# Altium PCB TCRT 16 (PCB1).PcbDoc
Units mm, origin at the board's own origin, x right, y up, seen from the top; angles counter-clockwise.
Board outline 110 x 85.31 mm, 2 copper layers (Top Layer, Bottom Layer); 56 components, 44 nets, 238 pads, 0 vias.
Unrouted connection lines stored in the file: 135.
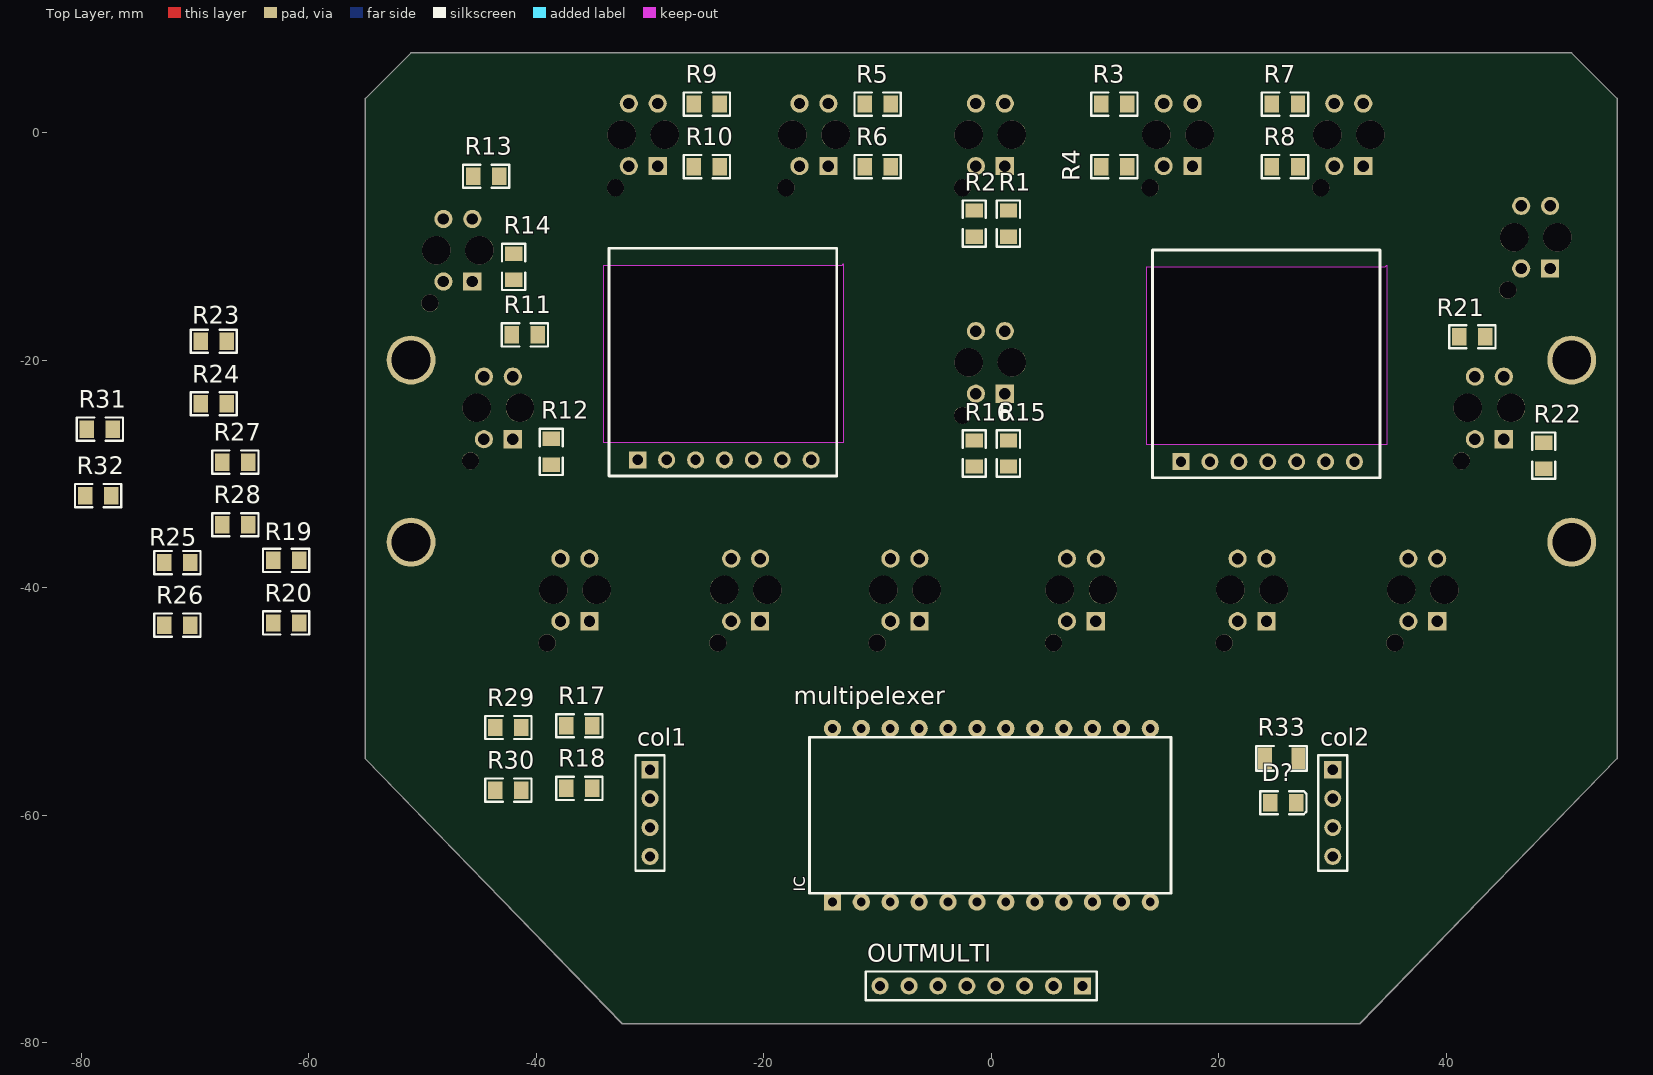
[diagram p0: Top Layer view]
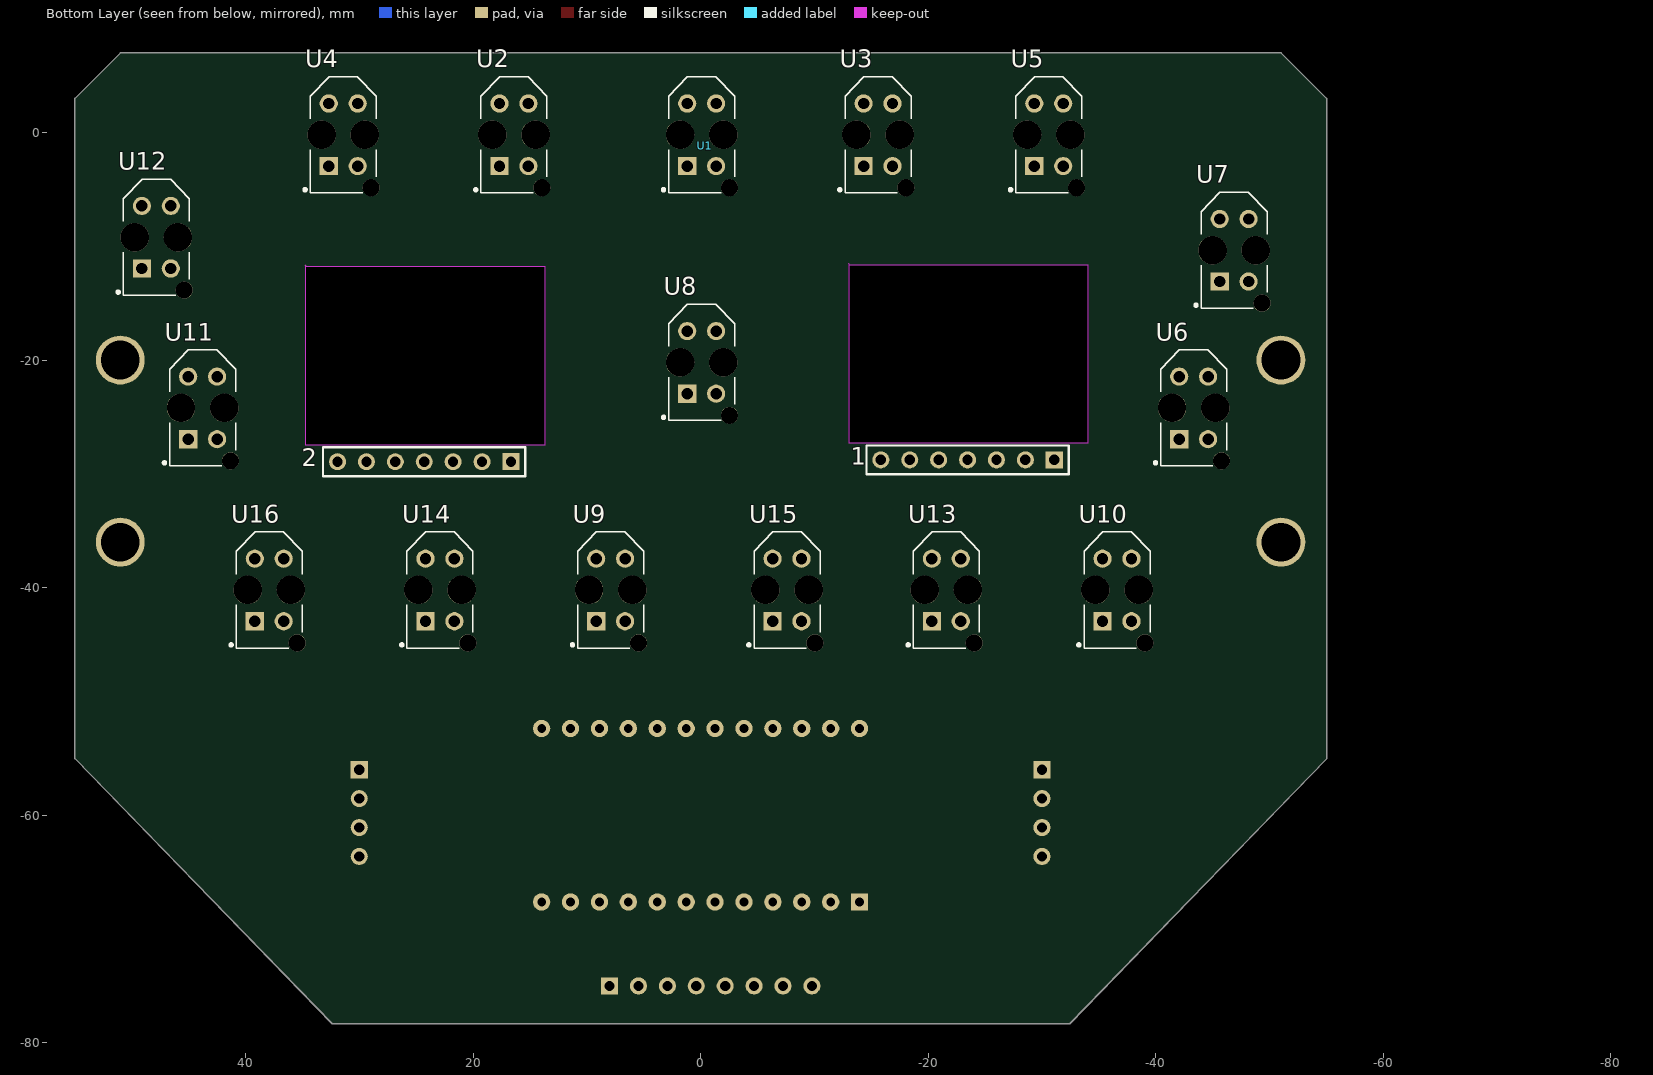
[diagram p1: Bottom Layer view, seen from below]

## Layer stack, top to bottom
Top Solder: solder mask 0.0102, Solder Resist, Dk 3.5
Top Layer: signal copper 0.0356
Dielectric 1: dielectric 0.32, FR-4, Dk 4.8
Bottom Layer: signal copper 0.0356
Bottom Solder: solder mask 0.0102, Solder Resist, Dk 3.5

## Board outline
-55.014,-55.056 -55.014,2.994 -51.014,6.994 50.986,6.994 54.986,2.994 54.986,-55.021 32.372,-78.32 -32.434,-78.32
cut-out: -34.08,-27.268 -34.08,-11.647 -13.125,-11.647 -12.998,-11.52 -12.998,-27.268
cut-out: 13.669,-27.432 13.669,-11.811 34.624,-11.811 34.751,-11.684 34.751,-27.432

## Design rules (kind name [scope] priority, off if disabled: settings)
Clearance [All] p1: gap=0.254 ignorepadtopadclearanceinfootprint=FALSE except(0: Arc-Hole Track-Hole SMDPad-Hole THPad-Hole Via-Hole Fill-Hole Poly-Hole Region-Hole Text-Hole)
PolygonConnect [All] p1: connectstyle=Relief reliefconductorwidth=0.254 reliefentries=4 polygonreliefangle="90 Angle" airgapwidth=0.254
RoutingVias [All] p1: holewidth=0.711 width=1.27 viastyle="Through Hole" minholewidth=0.711 minwidth=1.27 maxholewidth=0.711 maxwidth=1.27
SolderMaskExpansion [All] p1: expansion=0.102 istentingtop=FALSE
Width "Schematic Width Constraint_1" [InNet('VCC')] p1: maxlimit=1.5 minlimit=1 preferedwidth=1 minimp=50.000000 maximp=50.000000 favimp=50.000000
Width "Schematic Width Constraint" [InNet('GND')] p2: maxlimit=2 minlimit=1.7 preferedwidth=1.2 minimp=50.000000 maximp=50.000000 favimp=50.000000
Width [All] p3: maxlimit=1 minlimit=0.5 preferedwidth=0.7 minimp=50.000000 maximp=50.000000 favimp=50.000000
30 further rules are at their usual default settings.

## Components (designator, comment, footprint, x,y, rotation, side; value= is the part's Value field where it differs from the comment)
1 "Header 7" HDR1X7 -31.08,-28.768 r0 bottom locked
2 "Header 7" HDR1X7 16.669,-28.932 r0 bottom locked
col1 "Header 4" HDR1X4 -30,-56 r270 top
col2 "Header 4" HDR1X4 30,-56 r270 top
D? "LED-SMD(0805)" "0805 LED" 25.66,-58.894 r0 top
multipelexer "BC4067BE_*" PCBComponent_1 0,-60 r90 top
OUTMULTI "Header 8" HDR1X8 8,-75 r180 top
R1 "150" 0805 1.5,-8 r270 top
R2 "10K" 0805 -1.5,-8 r270 top
R3 "150" 0805 10.8,2.5 r180 top
R4 "10K" 0805 10.8,-3 r180 top
R5 "150" 0805 -10,2.5 r0 top
R6 "10K" 0805 -10,-3 r0 top
R7 "150" 0805 25.8,2.5 r180 top
R8 "10K" 0805 25.8,-3 r180 top
R9 "150" 0805 -25,2.5 r0 top
R10 "10K" 0805 -25,-3 r0 top
R11 "150" 0805 -40.991,-17.784 r0 top
R12 "10K" 0805 -38.688,-28.07 r270 top
R13 "150" 0805 -44.408,-3.84 r0 top
R14 "10K" 0805 -41.99,-11.816 r90 top
R15 "150" 0805 1.5,-28.211 r270 top
R16 "10K" 0805 -1.5,-28.211 r270 top
R17 "150" 0805 -36.203,-52.139 r180 top
R18 "10K" 0805 -36.203,-57.639 r180 top
R19 "150" 0805 -61.985,-37.603 r0 top
R20 "10K" 0805 -61.985,-43.103 r0 top
R21 "150" 0805 42.262,-17.956 r180 top
R22 "10K" 0805 48.548,-28.399 r270 top
R23 "150" 0805 -68.341,-18.341 r0 top
R24 "10K" 0805 -68.341,-23.841 r0 top
R25 "150" 0805 -71.532,-37.793 r0 top
R26 "10K" 0805 -71.532,-43.293 r0 top
R27 "150" 0805 -66.446,-28.964 r180 top
R28 "10K" 0805 -66.446,-34.464 r180 top
R29 "150" 0805 -42.442,-52.29 r0 top
R30 "10K" 0805 -42.442,-57.79 r0 top
R31 "150" 0805 -78.343,-26.066 r180 top
R32 "10K" 0805 -78.509,-31.912 r180 top
R33 "150" 1206 25.5,-55 r180 top
U1 "TCRT500" TCRT5000 -0.5,0 r90 bottom locked
U2 "TCRT500" TCRT5000 16,0 r90 bottom
U3 "TCRT500" TCRT5000 -16,0 r90 bottom
U4 "TCRT500" TCRT5000 31,0 r90 bottom
U5 "TCRT500" TCRT5000 -31,0 r90 bottom
U6 "TCRT500" TCRT5000 -43.734,-24 r90 bottom
U7 "TCRT500" TCRT5000 -47.294,-10.145 r90 bottom
U8 "TCRT500" TCRT5000 -0.5,-20 r90 bottom locked
U9 "TCRT500" TCRT5000 7.5,-40 r90 bottom
U10 "TCRT500" TCRT5000 -37,-40 r90 bottom
U11 "TCRT500" TCRT5000 43.358,-24 r90 bottom
U12 "TCRT500" TCRT5000 47.425,-9 r90 bottom
U13 "TCRT500" TCRT5000 -22,-40 r90 bottom
U14 "TCRT500" TCRT5000 22.5,-40 r90 bottom
U15 "TCRT500" TCRT5000 -8,-40 r90 bottom
U16 "TCRT500" TCRT5000 37.5,-40 r90 bottom

## Footprints (in the part's own frame and the unit in brackets; to place one, negate y for a bottom-side part, rotate by r counter-clockwise, add the part's x,y. Pads: shape width x height; smd on the part's side, far side on the other; paste and mask are expansions set on the pad)
0805 [mil]
  rect 50x60 smd: 1(-45,0) 2(45,0)
  silkscreen extent -80,-40 80,40, body extent -39,-25 39,25, height 31
"0805 LED" [mil]
  rect 50x60 smd: 1(-45,0) 2(45,0)
  silkscreen extent -80,-40 80,40, body extent -39,-25 39,25, height 32
1206 [mm]
  rect 1.2x1.9 smd: 1(-1.46,0) 2(1.46,0)
  silkscreen extent -2.22,-1.09 2.22,1.09, body extent -1.59,-0.8 1.61,0.8, height 1
HDR1X4 [mm] "Connector; Header; 4 Position"
  rect 1.5x1.5 hole 0.9: 1(0,0)
  round 1.5 hole 0.9: 2(2.54,0) 3(5.08,0) 4(7.62,0)
  silkscreen extent -1.27,-1.27 8.89,1.27
HDR1X7 [mm] "Connector; Header; 7 Position"
  rect 1.5x1.5 hole 0.9: 1(0,0)
  round 1.5 hole 0.9: 2(2.54,0) 3(5.08,0) 4(7.62,0) 5(10.16,0) 6(12.7,0) 7(15.24,0)
  silkscreen extent -1.27,-1.27 16.51,1.27
HDR1X8 [mm] "Connector; Header; 8 Position"
  rect 1.5x1.5 hole 0.9: 1(0,0)
  round 1.5 hole 0.9: 2(2.54,0) 3(5.08,0) 4(7.62,0) 5(10.16,0) 6(12.7,0) 7(15.24,0) 8(17.78,0)
  silkscreen extent -1.27,-1.27 19.05,1.27
PCBComponent_1 [mil]
  rect 60x60 hole 30 paste+0: 1(-300,550)
  round 60 hole 30 paste+0: 2(-300,450) 3(-300,350) 4(-300,250) 5(-300,150) 6(-300,50) 7(-300,-50) 8(-300,-150) 9(-300,-250) 10(-300,-350) 11(-300,-450) 12(-300,-550) 13(300,-550) 14(300,-450) 15(300,-350) 16(300,-250) 17(300,-150) 18(300,-50) 19(300,50) 20(300,150) 21(300,250) 22(300,350) 23(300,450) 24(300,550)
  silkscreen extent -270,-621 270,629, body extent -295,-616 296,634, height 36
TCRT5000 [mm]
  round 1.6 hole 1: A(2.547,1.676) E(-2.953,-0.864) K(2.547,-0.864)
  rect 1.6x1.6 hole 1: C(-2.953,1.676)
  round 1.5 hole 1.5 unplated: None(-4.853,-2.044)
  round 2.5 hole 2.5 unplated: None(-0.203,-1.494) None(-0.203,2.306)
  silkscreen extent -5.3,-2.49 4.9,3.88, body extent -5.28,-3 4.92,3.8, height 7.2

## Part data
1 2: "Header, 7-Pin", LatestRevisionDate=17-Jul-2002, LatestRevisionNote="Re-released for DXP Platform.", Publisher="Altium Limited"
col1 col2: "Header, 4-Pin", LatestRevisionDate=17-Jul-2002, LatestRevisionNote="Re-released for DXP Platform.", Publisher="Altium Limited"
OUTMULTI: "Header, 8-Pin", LatestRevisionDate=17-Jul-2002, LatestRevisionNote="Re-released for DXP Platform.", Publisher="Altium Limited"
R1 R2 R3 R4 R5 R6 R7 R8 R9 R10 R11 R12 R13 R14 R15 R16 R17 R18 R19 R20 R21 R22 R23 R24 R25 R26 R27 R28 R29 R30 R31 R32 R33: library part RESISTOR_SMD, "Choose your Favorite size from Footprint Section"
U1 U2 U3 U4 U5 U6 U7 U8 U9 U10 U11 U12 U13 U14 U15 U16: library part TCRT5000

## Free pads (board coordinates)
  round 4.3 hole 3.4: 20(-51,-36) 20(-51,-20) 20(51,-36) 20(51,-20)

## Nets (pads, with @x,y where several pads share a name; then routed paths per layer and width w, separated by ;. In a path a pad name is that pad's centre, name@x,y a point inside that pad or via, vN(x,y) a via of type N, cw(c..) or ccw(c..) an arc to the next point about the centre after c; other vN are vias at no path point)
A: multipelexer.10 OUTMULTI.2
B: multipelexer.11 OUTMULTI.3
C: multipelexer.14 OUTMULTI.4
D: multipelexer.13 OUTMULTI.5
GND: 1.6 2.6 col1.4 col2.4 D?.2 multipelexer.12 multipelexer.15 OUTMULTI.8 U1.E U1.K U2.E U2.K U3.E U3.K U4.E U4.K U5.E U5.K U6.E U6.K U7.E U7.K U8.E U8.K U9.E U9.K U10.E U10.K U11.E U11.K U12.E U12.K U13.E U13.K U14.E U14.K U15.E U15.K U16.E U16.K
NetD?_1: D?.1 R33.2
NetR1_1: R1.1 U1.A
NetR3_1: R3.1 U2.A
NetR5_1: R5.1 U3.A
NetR7_1: R7.1 U4.A
NetR9_1: R9.1 U5.A
NetR11_1: R11.1 U6.A
NetR13_1: R13.1 U7.A
NetR15_1: R15.1 U8.A
NetR17_1: R17.1 U9.A
NetR19_1: R19.1 U10.A
NetR21_1: R21.1 U11.A
NetR23_1: R23.1 U12.A
NetR25_1: R25.1 U13.A
NetR27_1: R27.1 U14.A
NetR29_1: R29.1 U15.A
NetR31_1: R31.1 U16.A
OUT1: multipelexer.6 R2.1 U1.C
OUT2: multipelexer.7 R4.1 U2.C
OUT3: multipelexer.5 R6.1 U3.C
OUT4: multipelexer.8 R8.1 U4.C
OUT5: multipelexer.4 R10.1 U5.C
OUT6: multipelexer.9 R12.1 U6.C
OUT7: multipelexer.3 R14.1 U7.C
OUT8: multipelexer.17 R16.1 U8.C
OUT9: multipelexer.20 R18.1 U9.C
OUT10: multipelexer.23 R20.1 U10.C
OUT11: multipelexer.16 R22.1 U11.C
OUT12: multipelexer.2 R24.1 U12.C
OUT13: multipelexer.22 R26.1 U13.C
OUT14: multipelexer.19 R28.1 U14.C
OUT15: multipelexer.21 R30.1 U15.C
OUT16: multipelexer.18 R32.1 U16.C
OUTPUT: multipelexer.1 OUTMULTI.6
SCL0: 1.4 col1.2
SCL1: 2.4 col2.2
SDA0: 1.3 col1.1
SDA1: 2.3 col2.1
VCC: 1.7 2.7 col1.3 col2.3 multipelexer.24 OUTMULTI.1 R1.2 R2.2 R3.2 R4.2 R5.2 R6.2 R7.2 R8.2 R9.2 R10.2 R11.2 R12.2 R13.2 R14.2 R15.2 R16.2 R17.2 R18.2 R19.2 R20.2 R21.2 R22.2 R23.2 R24.2 R25.2 R26.2 R27.2 R28.2 R29.2 R30.2 R31.2 R32.2 R33.1
pads on no net: 1.1 1.2 1.5 2.1 2.2 2.5 OUTMULTI.7 U1.None U2.None U3.None U4.None U5.None U6.None U7.None U8.None U9.None U10.None U11.None U12.None U13.None U14.None U15.None U16.None

## Silkscreen, mask and mechanical layers (free items; w line width, h text height)
Top Overlay:
  lines w0.254: -33.594,-30.174 -13.594,-30.174 -13.594,-10.174 -33.594,-10.174 -33.594,-30.174 ; 14.155,-30.338 34.155,-30.338 34.155,-10.338 14.155,-10.338 14.155,-30.338
Mechanical 1:
  the board outline again, w0.254

## Text inside footprints (layer, text, board x,y; h text height)
multipelexer: Top Overlay "IC" at -16.351,-66.733 h1 r90